# Altium PCB board.PcbDoc (part 2 of 2)
Units mil, origin at the board's own origin, x right, y up, seen from the top; angles counter-clockwise.
Board outline 5000 x 4000 mil, 2 copper layers (Top Layer, Bottom Layer); 120 components, 119 nets, 460 pads, 45 vias.
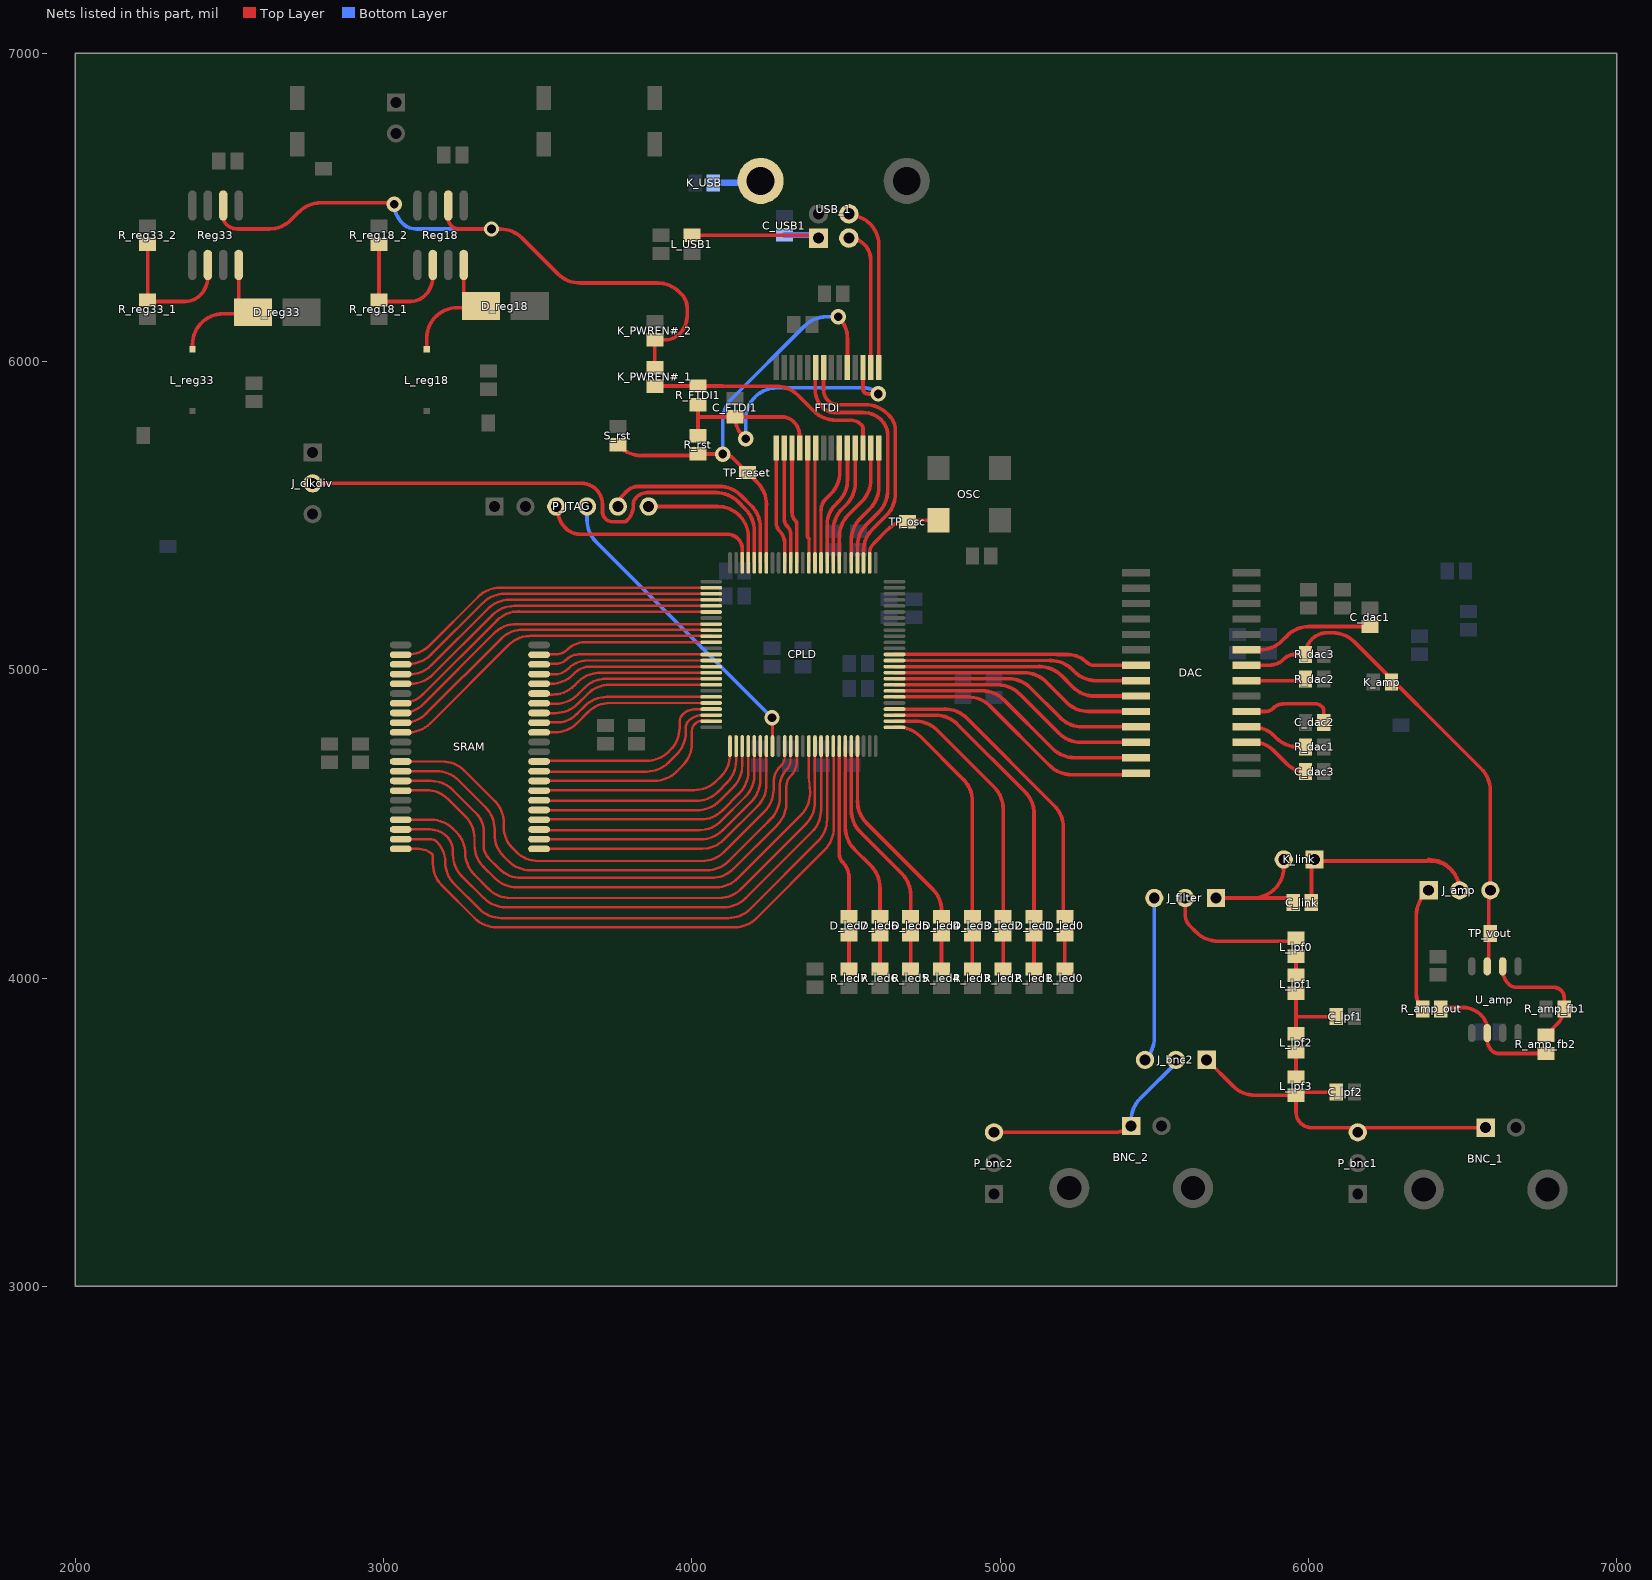
[diagram p2: the nets of this part, all layers, seen from the top]

## Via types
v1: diameter 50, hole 28, Top Layer to Bottom Layer, 42 vias
v2: diameter 196.85, hole 100, Top Layer to Bottom Layer, 3 vias

## Nets (pads, with @x,y where several pads share a name; then routed paths per layer and width w, separated by ;. In a path a pad name is that pad's centre, name@x,y a point inside that pad or via, vN(x,y) a via of type N, cw(c..) or ccw(c..) an arc to the next point about the centre after c; other vN are vias at no path point) (continued)
DAC_DATA6: CPLD.13 DAC.7 | length 797
  Top Layer w11: CPLD.13@4657.24,5050 5185.68,5050
  Top Layer w12: 5185.68,5049.69 5220.41,5049.69 cw(c5220.41,4965.41) 5280,5025 ccw(c5304.14,5049.14) 5304.14,5015 DAC.7@5440.87,5015 DAC.7@5445,5015
DAC_DATA7: CPLD.12 DAC.8 | length 806.2
  Top Layer w11: CPLD.12@4657.24,5030.31 5163.26,5030.31
  Top Layer w12: 5163.26,5030.31 cw(c5163.26,4930.31) 5233.97,5001.03 5240.71,4994.29 ccw(c5311.42,5065) 5311.42,4965 DAC.8@5440.87,4965 DAC.8@5445,4965
DAC_DATA8: CPLD.11 DAC.9 | length 813.8
  Top Layer w11: CPLD.11@4657.24,5010.63 5127.95,5010.63
  Top Layer w12: 5127.95,5010.63 cw(c5127.95,4910.63) 5198.66,4981.34 5235.71,4944.29 ccw(c5306.42,5015) 5306.42,4915 DAC.9@5440,4915
DAC_DATA9: CPLD.10 DAC.10 | length 826.3
  Top Layer w11: CPLD.10@4657.24,4990.94 5077.63,4990.94
  Top Layer w12: 5077.63,4990.94 cw(c5077.63,4890.94) 5148.34,4961.66 5215.71,4894.29 ccw(c5286.42,4965) 5286.42,4865 DAC.10@5440,4865
DAC_DATA10: CPLD.9 DAC.11 | length 838.9
  Top Layer w11: CPLD.9@4657.24,4971.26 5027.32,4971.26
  Top Layer w12: 5027.32,4971.26 cw(c5027.32,4871.26) 5098.03,4941.97 5195.71,4844.29 ccw(c5266.42,4915) 5266.42,4815 DAC.11@5440,4815
DAC_DATA11: CPLD.8 DAC.12 | length 861.4
  Top Layer w11: CPLD.8@4657.24,4951.57 4992,4951.57
  Top Layer w12: 4992,4951.57 cw(c4992,4851.57) 5062.71,4922.29 5190.71,4794.29 ccw(c5261.42,4865) 5261.42,4765 DAC.12@5440.87,4765 DAC.12@5450,4765
DAC_DATA12: CPLD.7 DAC.13 | length 864
  Top Layer w11: CPLD.7@4657.24,4931.89 4941.69,4931.89
  Top Layer w12: 4941.69,4931.89 cw(c4941.69,4831.89) 5012.4,4902.6 5170.71,4744.29 ccw(c5241.42,4815) 5241.42,4715 DAC.13@5440,4715
DAC_DATA13: CPLD.6 DAC.14 | length 883.6
  Top Layer w11: CPLD.6@4657.24,4912.2 4896.37,4912.2 cw(c4896.37,4812.2) 4967.08,4882.92
  Top Layer w12: 4967.08,4882.92 5160.71,4689.29 ccw(c5231.42,4760) 5231.42,4660 DAC.14@5445,4660
LED0: CPLD.4 D_led0.2 | length 1020.7
  Top Layer w11: CPLD.4@4657.24,4872.83 4820.74,4872.83
  Top Layer w12: 4820.74,4872.83 cw(c4820.74,4772.83) 4891.45,4843.55 5175.71,4559.29 cw(c5105,4488.58) 5205,4488.58 D_led0.2@5205,4195 ; D_led0.2@5210,4195 D_led0.2@5210,4199.53
LED1: CPLD.3 D_led1.2 | length 934.4
  Top Layer w11: CPLD.3@4657.24,4853.15 4790.43,4853.15
  Top Layer w12: 4790.43,4853.15 cw(c4790.43,4753.15) 4861.14,4823.86 5080.71,4604.29 cw(c5010,4533.58) 5110,4533.58 D_led1.2@5110,4200
LED2: CPLD.2 D_led2.2 | length 840
  Top Layer w11: CPLD.2@4657.24,4833.46 4725.11,4833.46
  Top Layer w12: 4725.11,4833.46 cw(c4725.11,4733.46) 4795.82,4804.18 4980.71,4619.29 cw(c4910,4548.58) 5010,4548.58 D_led2.2@5010,4195
LED3: CPLD.1 D_led3.2 | length 741.5
  Top Layer w11: CPLD.1@4669.8,4813.78 cw(c4669.8,4713.78) 4740.51,4784.49
  Top Layer w12: CPLD.1@4657.24,4813.78 CPLD.1@4669.8,4813.78 ; 4740.51,4784.49 4880.71,4644.29 cw(c4810,4573.58) 4910,4573.58 D_led3.2@4910,4200
LED4: CPLD.97 D_led4.2 | length 657.6
  Top Layer w11: 4537.17,4574.26 CPLD.97@4537.17,4752.76
  Top Layer w12: 4537.17,4574.26 ccw(c4637.17,4574.26) 4566.45,4503.55 4780.71,4289.29 cw(c4710,4218.58) 4810,4218.58 4810,4200 D_led4.2@4810,4199.53
LED5: CPLD.96 D_led5.2 | length 623.9
  Top Layer w11: 4517.48,4543.94 CPLD.96@4517.48,4752.76
  Top Layer w12: 4517.48,4543.94 ccw(c4617.48,4543.94) 4546.77,4473.23 4680.71,4339.29 cw(c4610,4268.58) 4710,4268.58 D_led5.2@4710,4200
LED6: CPLD.95 D_led6.2 | length 591.1
  Top Layer w11: 4497.8,4488.63 CPLD.95@4497.8,4752.76
  Top Layer w12: 4497.8,4488.63 ccw(c4597.8,4488.63) 4527.08,4417.92 4580.71,4364.29 cw(c4510,4293.58) 4610,4293.58 D_led6.2@4610,4199.53
LED7: CPLD.94 D_led7.2 | length 566.3
  Top Layer w11: 4478.11,4403.7 CPLD.94@4478.11,4752.76
  Top Layer w12: 4478.11,4403.7 ccw(c4518.7,4403.7) 4490,4375 cw(c4441.72,4326.72) 4510,4326.72 D_led7.2@4510,4195
MEM_ADDR0: CPLD.78 SRAM.5 | length 797.5
  Top Layer w8: SRAM.5@3504.41,4545.28 SRAM.5@3505,4545.28 ; SRAM.5@3505,4545 4018.58,4545 ccw(c4018.58,4645) 4026,4545.28 ccw(c4018.58,4645) 4089.29,4574.29 4133.86,4618.86 ccw(c4063.15,4689.57) 4163.15,4689.57 CPLD.78@4163.15,4752.76
MEM_ADDR1: CPLD.79 SRAM.4 | length 840.9
  Top Layer w8: SRAM.4@3505,4515 4028.58,4515 ccw(c4028.58,4615) 4099.29,4544.29 4153.55,4598.55 ccw(c4082.83,4669.26) 4182.83,4669.26 CPLD.79@4182.83,4752.76
MEM_ADDR2: CPLD.80 SRAM.3 | length 881.7
  Top Layer w8: SRAM.3@3504.41,4482.28 SRAM.3@3505,4482.28 ; SRAM.3@3505,4480 4023.58,4480 ccw(c4023.58,4580) 4044.83,4482.28 ccw(c4023.58,4580) 4073.15,4493.15 ccw(c4023.58,4580) 4094.29,4509.29 4173.23,4588.23 ccw(c4102.52,4658.94) 4189.37,4609.37 ccw(c4102.52,4658.94) 4202.52,4658.94 CPLD.80@4202.52,4752.76
MEM_ADDR3: CPLD.81 SRAM.2 | length 922.2
  Top Layer w8: SRAM.2@3505,4450 4028.58,4450 ccw(c4028.58,4550) 4068.17,4458.17 ccw(c4028.58,4550) 4099.29,4479.29 4192.92,4572.92 ccw(c4122.2,4643.63) 4214.03,4604.03 ccw(c4122.2,4643.63) 4222.2,4643.63 CPLD.81@4222.2,4752.76
MEM_ADDR4: CPLD.82 SRAM.1 | length 953.3
  Top Layer w8: SRAM.1@3515,4420 4033.58,4420 ccw(c4033.58,4520) 4104.29,4449.29 4212.6,4557.6 ccw(c4141.89,4628.31) 4241.89,4628.31 CPLD.82@4241.89,4752.76
MEM_ADDR5: CPLD.93 SRAM.44 | length 1951.7
  Top Layer w8: SRAM.44@3055.59,4419.29 3113.43,4419.29 cw(c3113.43,4353.43) 3160,4400 3160,4371.42 ccw(c3260,4371.42) 3165,4340.2 ccw(c3260,4371.42) 3189.29,4300.71 3295.71,4194.29 ccw(c3366.42,4265) 3366.42,4165 4138.58,4165 ccw(c4138.58,4265) 4209.29,4194.29 4430.71,4415.71 ccw(c4360,4486.42) 4460,4486.42 CPLD.93@4460,4750
MEM_ADDR6: CPLD.92 SRAM.43 | length 1928.1
  Top Layer w8: SRAM.43@3055,4450 SRAM.43@3056.43,4450 ; SRAM.43@3069.56,4445 cw(c3069.56,4464.76) SRAM.43@3056.42,4450 ; CPLD.92@4438.74,4752.76 4438.74,4515.16 cw(c4338.74,4515.16) 4409.45,4444.45 4189.29,4224.29 cw(c4118.58,4295) 4118.58,4195 3381.42,4195 cw(c3381.42,4295) 3310.71,4224.29 3229.29,4305.71 cw(c3300,4376.42) 3200,4376.42 ccw(c3106.86,4376.42) 3172.72,4442.28 ccw(c3154.08,4423.64) 3154.08,4450 SRAM.43@3057.49,4450 ; SRAM.43@3055.59,4450.79 ccw(c3057.49,4452.69) SRAM.43@3057.49,4450 ; SRAM.43@3055.59,4450.79 ccw(c3057.49,4452.69) SRAM.43@3057.49,4450 ; SRAM.43@3055.59,4450.79 ccw(c3069.56,4464.76) SRAM.43@3056.42,4450 ; SRAM.43@3056.43,4450 SRAM.43@3057.49,4450
MEM_ADDR7: CPLD.91 SRAM.42 | length 1853.8
  Top Layer w8: SRAM.42@3055.59,4482.28 3151.2,4482.28 cw(c3151.2,4406.2) 3205,4460 cw(c3156.72,4411.72) 3225,4411.72 3225,4400 ccw(c3321.57,4400) 3253.28,4331.72 3325.71,4259.29 ccw(c3396.42,4330) 3396.42,4230 4103.58,4230 ccw(c4103.58,4330) 4174.29,4259.29 4389.77,4474.77 ccw(c4319.06,4545.48) 4419.06,4545.48 CPLD.91@4419.06,4752.76
MEM_ADDR8: CPLD.55 SRAM.27 | length 1103.7
  Top Layer w8: SRAM.27@3055,4955 3088.58,4955 ccw(c3088.58,5055) 3106.65,4956.65 ccw(c3088.58,5055) 3159.29,4984.29 3353.19,5178.19 cw(c3423.9,5107.48) 3423.9,5207.48 CPLD.55@4062.76,5207.48
MEM_ADDR9: CPLD.54 SRAM.26 | length 1120.1
  Top Layer w8: SRAM.26@3034.37,4985 3050,4985 3055.59,4985 3083.58,4985 ccw(c3083.58,5085) 3101.65,4986.65 ccw(c3083.58,5085) 3154.29,5014.29 3337.88,5197.88 cw(c3408.59,5127.17) 3408.59,5227.17 CPLD.54@4062.76,5227.17
MEM_ADDR10: CPLD.53 SRAM.25 | length 1093.1
  Top Layer w8: SRAM.25@3055,5020 3083.58,5020 ccw(c3083.58,5120) 3154.29,5049.29 3322.56,5217.56 cw(c3393.27,5146.85) 3374.49,5245.07 cw(c3393.27,5146.85) 3393.27,5246.85 CPLD.53@4062.76,5246.85
MEM_ADDR11: CPLD.52 SRAM.24 | length 1093.8
  Top Layer w8: SRAM.24@3050,5050 3055,5050 3055.59,5050 3058.58,5050 3078.58,5050 ccw(c3078.58,5150) 3149.29,5079.29 3307.25,5237.25 cw(c3377.96,5166.54) 3377.96,5266.54 CPLD.52@4062.76,5266.54
MEM_ADDR12: CPLD.61 SRAM.21 | length 573.3
  Top Layer w8: SRAM.21@3500,5050 3558.79,5050 ccw(c3558.79,5101.21) 3571.64,5051.64 ccw(c3558.79,5101.21) 3595,5065 cw(c3653.83,5006.17) 3653.83,5089.37 CPLD.61@4062.76,5089.37
MEM_ADDR13: CPLD.63 SRAM.20 | length 566.4
  Top Layer w8: SRAM.20@3504.41,5017.72 SRAM.20@3505,5017.72 ; SRAM.20@3505,5020 3558.79,5020 ccw(c3558.79,5071.21) 3595,5035 cw(c3631.21,4998.79) 3631.21,5050 CPLD.63@4062.76,5050
MEM_ADDR14: CPLD.64 SRAM.19 | length 574.9
  Top Layer w8: SRAM.19@3500,4985 3551.72,4985 ccw(c3551.72,5053.28) 3564.57,4986.22 ccw(c3551.72,5053.28) 3600,5005 cw(c3661.12,4943.88) 3661.12,5030.32 CPLD.64@4062.76,5030.31
MEM_ADDR15: CPLD.65 SRAM.18 | length 578.5
  Top Layer w8: SRAM.18@3500,4955 3543.58,4955 ccw(c3543.58,5055) 3614.29,4984.29 3620,4990 cw(c3669.8,4940.19) 3665.5,5010.5 cw(c3669.8,4940.19) 3669.8,5010.63 CPLD.65@4062.76,5010.63
MEM_C\E\: CPLD.77 SRAM.6 | length 759.9
  Top Layer w8: SRAM.6@3505,4575 4013.58,4575 ccw(c4013.58,4675) 4084.29,4604.29 4114.18,4634.18 ccw(c4043.46,4704.89) 4143.46,4704.89 CPLD.77@4143.46,4752.76 cw(c4139.76,4749.05) CPLD.77@4145,4749.05
MEM_DATA0: CPLD.76 SRAM.7 | length 714.4
  Top Layer w8: SRAM.7@3504.41,4608.27 cw(c3508.59,4604.09) SRAM.7@3508.59,4610 ; SRAM.7@3505,4610 SRAM.7@3508.59,4610 ; CPLD.76@4123.78,4752.76 4123.78,4725.2 cw(c4023.78,4725.2) 4094.49,4654.49 4079.29,4639.29 cw(c4008.58,4710) 4008.58,4610 SRAM.7@3508.59,4610
MEM_DATA1: CPLD.74 SRAM.8 | length 684.3
  Top Layer w8: 3805,4639.76 SRAM.8@3504.41,4639.76 ; 3805,4640 3878.58,4640 ccw(c3878.58,4740) 3899.27,4642.16 ccw(c3878.58,4740) 3949.29,4669.29 3970.71,4690.71 ccw(c3900,4761.42) 4000,4761.42 4000,4800.86 cw(c4034.14,4800.86) 4009.98,4824.98 cw(c4034.14,4800.86) 4024.02,4833.46 cw(c4034.14,4800.86) 4034.14,4835 CPLD.74@4060,4835 ; CPLD.74@4060,4833.46 CPLD.74@4062.76,4833.46 ; SRAM.8@3504.41,4639.76 cw(c3504.65,4639.76) SRAM.8@3504.65,4640 ; SRAM.8@3504.41,4639.76 cw(c3504.65,4639.76) SRAM.8@3504.65,4640 ; SRAM.8@3504.41,4639.76 cw(c3504.65,4639.76) SRAM.8@3504.65,4640
MEM_DATA2: CPLD.73 SRAM.9 | length 666.9
  Top Layer w8: SRAM.9@3500,4670 3853.58,4670 ccw(c3853.58,4770) 3924.29,4699.29 3950.71,4725.71 ccw(c3880,4796.42) 3980,4796.42 3980,4810.86 cw(c4014.14,4810.86) 3989.98,4834.98 cw(c4033.82,4791.18) 4033.82,4853.15 CPLD.73@4062.76,4853.15
MEM_DATA3: CPLD.72 SRAM.10 | length 659.1
  Top Layer w8: SRAM.10@3504.41,4702.76 SRAM.10@3505,4702.76 ; SRAM.10@3505,4705 3853.58,4705 ccw(c3853.58,4805) 3924.29,4734.29 3930.71,4740.71 ccw(c3860,4811.42) 3960,4811.42 3960,4830.86 cw(c3994.14,4830.86) 3961.8,4841.8 cw(c3994.14,4830.86) 3970,4855 cw(c4013.06,4811.94) 3986.96,4866.96 cw(c4013.06,4811.94) 4013.06,4872.83 CPLD.72@4062.76,4872.83
MEM_DATA4: CPLD.71 SRAM.13 | length 595.9
  Top Layer w8: SRAM.13@3500,4795 SRAM.13@3504.41,4795 ; SRAM.13@3504.41,4797.24 3555.82,4797.24 ccw(c3555.82,4897.24) 3605.4,4810.4 ccw(c3555.82,4897.24) 3626.53,4826.53 3663.23,4863.23 cw(c3733.94,4792.52) 3733.37,4892.52 cw(c3733.94,4792.52) 3733.94,4892.52 CPLD.71@4062.76,4892.52 ; CPLD.71@4062.76,4894.3 CPLD.71@4065,4894.3
MEM_DATA5: CPLD.70 SRAM.14 | length 589
  Top Layer w8: SRAM.14@3500,4830 3567.74,4830 ccw(c3567.74,4906) 3621.48,4852.26 ccw(c3558.58,4930) 3629.29,4859.29 3652.92,4882.92 cw(c3723.63,4812.2) 3723.63,4912.2 CPLD.70@4062.76,4912.2
MEM_DATA6: CPLD.68 SRAM.15 | length 605
  Top Layer w8: SRAM.15@3500,4860 3558.58,4860 ccw(c3558.58,4960) 3629.29,4889.29 3662.29,4922.29 cw(c3733,4851.57) 3733,4951.57 CPLD.68@4062.76,4951.57 ; SRAM.15@3504.41,4860.24 3505.36,4861.18 cw(c3576.07,4790.47) SRAM.15@3514.03,4868.91
MEM_DATA7: CPLD.67 SRAM.16 | length 587.8
  Top Layer w8: SRAM.16@3500,4890 3558.58,4890 ccw(c3558.58,4990) 3577.11,4891.73 ccw(c3558.58,4990) 3629.29,4919.29 3651.97,4941.97 cw(c3722.68,4871.26) 3690.78,4966.03 cw(c3722.68,4871.26) 3706.86,4970 cw(c3722.68,4871.26) 3722.68,4971.26 CPLD.67@4062.76,4971.26
MEM_DATA8: CPLD.56 SRAM.29 | length 1146.1
  Top Layer w8: SRAM.29@3055.59,4891.73 3057.68,4891.73 ccw(c3057.68,4991.73) 3128.39,4921.02 3367.66,5160.29 cw(c3438.37,5089.57) 3438.37,5189.57 ; 3419.22,5187.8 CPLD.56@4062.76,5187.8 ; CPLD.56@4056.44,5186.02 CPLD.56@4060,5189.57
MEM_DATA9: CPLD.58 SRAM.30 | length 1140.3
  Top Layer w8: SRAM.30@3035.59,4860 3055,4860 3055.59,4860 3058.58,4860 ccw(c3058.58,4960) 3068.1,4860.45 ccw(c3058.58,4960) 3129.29,4889.29 3359.14,5119.14 cw(c3429.85,5048.43) 3429.85,5148.43 CPLD.58@4062.76,5148.43 CPLD.58@4061.18,5150
MEM_DATA10: CPLD.59 SRAM.31 | length 1120.6
  Top Layer w8: SRAM.31@3055.59,4828.74 3067.32,4828.74 ccw(c3067.32,4928.74) 3102.14,4835 ccw(c3067.32,4928.74) 3138.03,4858.03 3380.71,5100.71 cw(c3451.42,5030) 3434.69,5128.59 cw(c3451.42,5030) 3451.42,5130 CPLD.59@4060,5130
MEM_DATA11: CPLD.60 SRAM.32 | length 1154.8
  Top Layer w8: SRAM.32@3035.59,4795 SRAM.32@3060,4795 ; SRAM.32@3055.59,4797.24 3080.82,4797.24 ccw(c3080.82,4897.24) 3084.65,4797.32 ccw(c3080.82,4897.24) 3151.53,4826.53 3405.71,5080.71 cw(c3476.42,5010) 3462.71,5109.06 cw(c3476.42,5010) 3476.42,5110 CPLD.60@4065,5110
MEM_DATA12: CPLD.85 SRAM.35 | length 1695.3
  Top Layer w8: SRAM.35@3040.76,4705 cw(c3040.76,4687.93) SRAM.35@3052.21,4700.59 ; SRAM.35@3048.94,4700 ccw(c3048.94,4709.41) SRAM.35@3052.22,4700.59 ; SRAM.35@3055,4705 SRAM.35@3061.01,4705 ; SRAM.35@3062.24,4700 cw(c3062.24,4709.41) SRAM.35@3055.59,4702.76 ; CPLD.85@4300.94,4752.76 4300.94,4716.42 cw(c4263.58,4716.42) 4290,4690 4286.21,4686.21 ccw(c4337.43,4635) 4265,4635 4265,4611.42 cw(c4165,4611.42) 4235.71,4540.71 4104.29,4409.29 cw(c4033.58,4480) 4033.58,4380 3501.42,4380 cw(c3501.42,4480) 3430.71,4409.29 3418.28,4421.72 cw(c3486.57,4490) 3390,4490 3390,4503.58 ccw(c3290,4503.58) 3360.71,4574.29 3261.53,4673.47 ccw(c3190.82,4602.76) 3190.82,4702.76 SRAM.35@3055.59,4702.76 ; SRAM.35@3052.21,4700.59 cw(c3040.76,4687.93) 3052.83,4700 ccw(c3052.83,4702.76) SRAM.35@3055.59,4702.76 ; SRAM.35@3052.22,4700.59 ccw(c3048.94,4709.41) SRAM.35@3055.59,4702.76 ; SRAM.35@3055.59,4702.76 cw(c3061.01,4697.34) SRAM.35@3061.01,4705 ; SRAM.35@3055.59,4702.76 cw(c3061.01,4697.34) SRAM.35@3061.01,4705
MEM_DATA13: CPLD.86 SRAM.36 | length 1737.8
  Top Layer w8: SRAM.36@3055.59,4671.26 3172.32,4671.26 cw(c3172.32,4571.26) 3243.03,4641.97 3330.71,4554.29 cw(c3260,4483.58) 3360,4483.58 3360,4465 ccw(c3456.57,4465) 3388.28,4396.72 3405.71,4379.29 ccw(c3476.42,4450) 3476.42,4350 4048.58,4350 ccw(c4048.58,4450) 4119.29,4379.29 4235,4495 ; 4260.71,4520.71 4250,4510 ; 4309.91,4679.91 cw(c4358.28,4631.72) 4310,4680 ; CPLD.86@4320,4745 4320,4704.14 cw(c4285.86,4704.14) 4310,4680 ; CPLD.86@4320.63,4745 CPLD.86@4320.63,4752.76 ; 4235,4495 4255.71,4515.71 ; 4235,4495 4250,4510 ; 4250,4510 4255.71,4515.71 ; 4255.71,4515.71 ccw(c4185,4586.42) 4285,4586.42 4285,4619.64 cw(c4370.36,4619.64) 4310,4680
MEM_DATA14: CPLD.87 SRAM.37 | length 1736.4
  Top Layer w8: SRAM.37@3055.59,4639.76 3153.81,4639.76 cw(c3153.81,4539.76) 3224.53,4610.47 3300.25,4534.75 cw(c3240.5,4475) 3325,4475 3325,4430 ; 3325,4428.06 ccw(c3380.67,4428.06) 3341.3,4388.7 3375.71,4354.29 ccw(c3446.42,4425) 3446.42,4325 4063.58,4325 ccw(c4063.58,4425) 4134.29,4354.29 4277.27,4497.27 ccw(c4206.56,4567.98) 4305.53,4553.68 ccw(c4206.56,4567.98) 4306.56,4567.98 4306.56,4622.56 cw(c4352.44,4622.56) 4320,4655 ccw(c4270.96,4704.04) 4340.31,4704.04 CPLD.87@4340.31,4752.76
MEM_DATA15: CPLD.89 SRAM.38 | length 1794.7
  Top Layer w8: SRAM.38@3055,4610 3138.58,4610 cw(c3138.58,4510) 3157.11,4608.27 cw(c3138.58,4510) 3209.29,4580.71 3265.71,4524.29 cw(c3195,4453.58) 3295,4453.58 3295,4431.42 ccw(c3395,4431.42) 3324.29,4360.71 3360.71,4324.29 ccw(c3431.42,4395) 3431.42,4295 4078.58,4295 ccw(c4078.58,4395) 4149.29,4324.29 4350.4,4525.4 ; 4350.71,4525.71 4350.4,4525.4 ; 4379.69,4648.9 4379.69,4670 CPLD.89@4379.69,4752.76 ; 4380,4645 4383.37,4599.79 cw(c4283.37,4599.79) 4354.08,4529.08 4350.4,4525.4
MEM_O\E\: CPLD.90 SRAM.41 | length 1821.3
  Top Layer w8: SRAM.41@3055,4515 SRAM.41@3060,4515 ; SRAM.41@3055.59,4513.78 3154.8,4513.78 cw(c3154.8,4413.78) 3225.51,4484.49 3235.71,4474.29 cw(c3165,4403.58) 3265,4403.58 3265,4395 ; 3265,4406.42 ccw(c3365,4406.42) 3294.29,4335.71 3340.71,4289.29 ccw(c3411.42,4360) 3411.42,4260 4088.58,4260 ccw(c4088.58,4360) 4159.29,4289.29 4370.08,4500.08 ccw(c4299.37,4570.79) 4399.37,4570.79 CPLD.90@4399.37,4752.76
MEM_W\E\: CPLD.66 SRAM.17 | length 583.5
  Top Layer w8: SRAM.17@3500,4920 3548.58,4920 ccw(c3548.58,5020) 3573.78,4923.23 ccw(c3548.58,5020) 3619.29,4949.29 3631.66,4961.66 cw(c3702.37,4890.94) 3677.91,4987.91 cw(c3702.37,4890.94) 3702.37,4990.94 CPLD.66@4062.76,4990.94
NetBNC_1_1: BNC_1.1 C_lpf2.2 J_bnc2.1 L_lpf3.2 P_bnc1.3 | length 1180.1
  Top Layer w12: J_bnc2.1@5687.07,3740 ccw(c5687.07,3722.93) 5675,3735 J_bnc2.1@5670,3735 5755.24,3649.76 ccw(c5825.95,3720.47) 5825.95,3620.47 L_lpf3.2@5960,3620.47 ; L_lpf3.2@5960,3620 5960,3565 ccw(c6010,3565) 6010,3515 BNC_1.1@6575,3515 ; L_lpf3.2@5960,3630 C_lpf2.2@6090,3630
NetBNC_2_1: BNC_2.1 J_bnc2.2 P_bnc2.3 | length 713.2
  Top Layer w12: P_bnc2.3@4980,3500 5371.72,3500 ccw(c5371.72,3568.28) BNC_2.1@5420,3520
  Bottom Layer w12: BNC_2.1@5425,3520 5425,3538.58 cw(c5525,3538.58) 5454.29,3609.29 J_bnc2.2@5575,3730
NetC_dac1_2: C_dac1.2 DAC.23 | length 427.4
  Top Layer w12: DAC.23@5799.13,5065 5843.58,5065 ccw(c5843.58,5165) 5914.29,5094.29 5931.72,5111.72 cw(c6000,5043.43) 6000,5140 cw(c6001.14,5138.86) 6001.14,5140.47 C_dac1.2@6200,5140.47 ; C_dac1.2@6198.86,5140 ccw(c6198.86,5141.61) C_dac1.2@6200,5140.47 ; C_dac1.2@6198.86,5140 ccw(c6198.86,5141.61) C_dac1.2@6200,5140.47 ; C_dac1.2@6198.86,5140 ccw(c6198.86,5141.61) C_dac1.2@6200,5140.47
NetC_dac2_2: C_dac2.2 DAC.19 | length 345.2
  Top Layer w12: DAC.19@5799.13,4865 5860.86,4865 ccw(c5860.86,4899.14) 5885,4875 cw(c5921.21,4838.79) 5921.21,4890 5985,4890 ; 5946.21,4890 5985,4890 ; C_dac2.2@6049.53,4830 6049.53,4869.07 ccw(c6034.07,4869.07) 6045,4880 ccw(c6020.86,4855.86) 6020.86,4890 5985,4890
NetC_dac3_1: C_dac3.1 DAC.17 | length 271.8
  Top Layer w12: DAC.17@5795,4765 DAC.17@5799.13,4765 ; DAC.17@5828.58,4765 DAC.17@5799.13,4765 ; C_dac3.1@5984.29,4675.71 C_dac3.1@5990,4670 ; C_dac3.1@5986.42,4670 C_dac3.1@5990,4670 ; C_dac3.1@5990.47,4670 C_dac3.1@5990,4670 ; C_dac3.1@5992.74,4672.26 C_dac3.1@5995,4670 ; DAC.17@5799.13,4765 5824.64,4765 cw(c5824.64,4679.64) 5885,4740 5930.25,4694.75 ccw(c5990,4754.5) C_dac3.1@5990,4670
NetC_FTDI1_1: C_FTDI1.1 FTDI.4 FTDI.17 R_FTDI1.2 R_rst.2 | length 1356.8
  Top Layer w12: R_rst.2@4020,5755 4020,5820.47 ; R_FTDI1.2@4020,5860.47 4020,5820.47 ; C_FTDI1.1@4133,5820.47 C_FTDI1.1@4140,5820.47 ; v1(4175,5750) v1@4165.08,5759.92 ; FTDI.4@4350,5715 4350,5719.09 FTDI.4@4350,5720.14 ; FTDI.4@4350.43,5719.09 cw(c4351.48,5720.14) FTDI.4@4350,5720.14 ; FTDI.17@4555,5980 4555,5912.07 ccw(c4572.07,5912.07) 4560,5900 ccw(c4572.07,5912.07) 4572.07,5895 v1(4605,5895) ; 4020,5820.47 C_FTDI1.1@4140,5820.47 ; C_FTDI1.1@4140,5820.47 ccw(c4225.64,5820.47) v1@4165.08,5759.92 ; C_FTDI1.1@4140,5820.47 ccw(c4225.64,5820.47) v1@4165.08,5759.92 ; C_FTDI1.1@4140,5820.47 4292.65,5820.47 cw(c4292.65,5767.65) 4330,5805 cw(c4281.72,5756.72) 4350,5756.72 FTDI.4@4350,5720.14 ; FTDI.17@4555,5980.53 cw(c4555.54,5980.53) FTDI.17@4555.16,5980.91 ccw(c4555.54,5980.53) FTDI.17@4555,5980.53
  Bottom Layer w12: v1(4175,5750) 4175,5813.58 cw(c4275,5813.58) 4204.29,5884.29 4205.71,5885.71 cw(c4276.42,5815) 4276.42,5915 4556.72,5915 cw(c4556.72,5846.72) v1(4605,5895)
NetC_link_1: C_link.1 J_amp.2 K_link.1 | length 862.9
  Top Layer w12: C_link.1@6005,4245 C_link.1@6009.53,4245 C_link.1@6020,4245 ; C_link.1@6010,4245 6010,4375 cw(c6015,4375) 6015,4380 6385,4380 ccw(c6385,4385) 6390,4385 cw(c6390,4285) J_amp.2@6490,4285 ; 6395,4380 cw(c6395,4285) J_amp.2@6490,4285 ; J_amp.2@6490,4310.86 J_amp.2@6490,4285
NetC_link_2: C_link.2 J_filter.1 K_link.2 | length 440.4
  Top Layer w12: J_filter.1@5700,4260 5820,4260 ; K_link.2@5915,4380 cw(c5915,4345) K_link.2@5920,4379.64 ; K_link.2@5920,4385 K_link.2@5920,4379.64 ; C_link.2@5950,4245 C_link.2@5950.47,4245 ; C_link.2@5950,4255 ccw(c5945,4255) 5945,4260 5820,4260 ; 5820,4260 ccw(c5820,4360) 5920,4360 K_link.2@5920,4379.64
NetC_lpf1_2: C_lpf1.2 L_lpf1.2 L_lpf2.1 | length 260.9
  Top Layer w12: L_lpf2.1@5960,3820 5960,3875 ; L_lpf1.2@5960,3950.47 5960,3875 ; C_lpf1.2@6090.47,3875 5960,3875
NetC_USB1_1: C_USB1.1 L_USB1.1 USB_1.1 | length 527.9
  Top Layer w12: USB_1.1@4410,6400 ccw(c4400.47,6400) 4400.47,6409.53 L_USB1.1@4000,6409.53 ; L_USB1.1@4000,6409.53 cw(c4000.47,6409.53) 4000.47,6410 ccw(c4000.47,6409.53) L_USB1.1@4000,6409.53
  Bottom Layer w12: USB_1.1@4394.53,6410.47 cw(c4394.53,6400) USB_1.1@4405,6400
  Bottom Layer w20: C_USB1.1@4300,6410.47 USB_1.1@4394.53,6410.47
NetCPLD_27: CPLD.27 OSC.3 TP_osc.1 | length 272.9
  Top Layer w11: CPLD.27@4576.54,5377.49 cw(c4622.51,5377.49) 4590,5410
  Top Layer w12: 4590,5410 4635.71,5455.71 cw(c4706.42,5385) 4706.42,5485 4715,5485 OSC.3@4800,5485
NetCPLD_28: CPLD.28 FTDI.22 | length 914.2
  Top Layer w11: CPLD.28@4556.85,5347.24 4556.85,5387.04
  Top Layer w12: FTDI.22@4427.2,5980.91 4427.2,5907.8 ; 4556.85,5387.04 cw(c4652.96,5387.04) 4585,5455 ; 4586.14,5456.14 4630.71,5500.71 ccw(c4560,5571.42) 4660,5571.42 4660,5776.72 ccw(c4591.72,5776.72) 4640,5825 4634.29,5830.71 ccw(c4563.58,5760) 4563.58,5860 4475,5860 ; 4427.2,5907.8 ccw(c4475,5907.8) 4475,5860 ; 4427.2,5907.8 ccw(c4475,5907.8) 4475,5860
NetCPLD_29: CPLD.29 FTDI.23 | length 842.7
  Top Layer w11: CPLD.29@4537.17,5347.24 4537.17,5402.8
  Top Layer w12: 4400,5900 FTDI.23@4400,5977.01 ; 4400.55,5900.65 ccw(c4485.36,5910.36) 4400.72,5899.28 ccw(c4485.36,5910.36) 4425,5850 ccw(c4461.21,5886.21) 4461.21,5835 4530,5835 4554.64,5835 cw(c4554.64,5749.64) 4615,5810 cw(c4566.72,5761.72) 4635,5761.72 4635,5581.42 cw(c4535,5581.42) 4605.71,5510.71 4566.45,5471.45 ; FTDI.23@4401.61,5980 FTDI.23@4401.61,5980.91 ; 4537.17,5402.8 cw(c4632.2,5402.8) 4565,5470 ; FTDI.23@4400,5977.01 cw(c4405.51,5977.01) FTDI.23@4401.61,5980.91 ; FTDI.23@4400,5977.01 cw(c4405.51,5977.01) FTDI.23@4401.61,5980.91
NetCPLD_30: CPLD.30 FTDI.14 | length 400.1
  Top Layer w11: CPLD.30@4517.48,5347.24 4517.48,5421.06
  Top Layer w12: 4517.48,5421.06 cw(c4617.48,5421.06) 4546.77,5491.77 4550,5495 4577.05,5522.05 ccw(c4506.34,5592.76) 4606.34,5592.76 FTDI.14@4606.34,5719.09
NetCPLD_32: CPLD.32 FTDI.13 | length 409.2
  Top Layer w11: CPLD.32@4478.11,5347.24 4478.11,5431.69
  Top Layer w12: 4478.11,5431.69 cw(c4578.11,5431.69) 4507.4,5502.4 ; 4505,5500 4551.46,5546.46 ccw(c4480.75,5617.17) 4580.75,5617.17 FTDI.13@4580.75,5719.09
NetCPLD_44: CPLD.44 FTDI.19 R_rst.1 S_rst.2 TP_reset.1 | length 1584
  Top Layer w11: CPLD.44@4241.89,5347.24 4241.89,5536.69
  Top Layer w12: S_rst.2@3760,5730.47 3766.18,5724.29 ccw(c3836.89,5795) 3836.89,5695 R_rst.1@4025,5695 ; R_rst.1@4025,5700 v1(4100,5700) cw(c4100,5651.72) 4134.14,5685.86 TP_reset.1@4180,5640 4212.6,5607.4 cw(c4141.89,5536.69) 4241.89,5536.69 ; v1(4475,6145) 4475.71,6144.29 cw(c4405,6073.58) 4505,6073.58 FTDI.19@4505,5975
  Bottom Layer w12: v1(4100,5700) 4100,5808.58 cw(c4200,5808.58) 4129.29,5879.29 4365.71,6115.71 cw(c4436.42,6045) 4436.42,6145 v1(4475,6145)
NetCPLD_45: CPLD.45 P_JTAG.5 | length 681.7
  Top Layer w11: CPLD.45@4222.2,5347.24 4222.2,5461.37
  Top Layer w12: P_JTAG.5@3760,5530 cw(c3808.28,5530) 3774.14,5564.14 3790,5580 cw(c3826.21,5543.79) 3826.21,5595 4088.58,5595 cw(c4088.58,5495) 4159.29,5565.71 4192.92,5532.08 cw(c4122.2,5461.37) 4222.2,5461.37
NetCPLD_46: CPLD.46 J_clkdiv.2 | length 1741.9
  Top Layer w11: CPLD.46@4202.52,5347.24 4202.52,5451.06
  Top Layer w12: J_clkdiv.2@2770,5605 3641.72,5605 cw(c3641.72,5536.72) 3690,5585 cw(c3641.72,5536.72) 3710,5536.72 3710,5515 ; 3710,5514.14 ccw(c3744.14,5514.14) 3719.98,5490.02 ccw(c3744.14,5514.14) 3744.14,5480 3777.93,5480 ccw(c3777.93,5497.07) 3790,5485 ccw(c3741.72,5533.28) 3810,5533.28 3810,5535.86 cw(c3844.14,5535.86) 3820,5560 cw(c3856.21,5523.79) 3856.21,5575 4078.58,5575 cw(c4078.58,5475) 4149.29,5545.71 4173.23,5521.77 cw(c4102.52,5451.06) 4202.52,5451.06
NetCPLD_47: CPLD.47 P_JTAG.6 | length 462
  Top Layer w11: 4154.29,5500.71 cw(c4084.61,5431.04) 4183.15,5431.04
  Top Layer w12: P_JTAG.6@3860,5530 4083.58,5530 cw(c4083.58,5430) 4154.29,5500.71 ; CPLD.47@4182.83,5347.24 4182.83,5429.77
NetCPLD_48: CPLD.48 P_JTAG.3 | length 727.3
  Top Layer w12: P_JTAG.3@3565,5530 3565,5520.36 ccw(c3650.36,5520.36) 3590,5460 ccw(c3638.28,5508.28) 3638.28,5440 4113.79,5440 cw(c4113.79,5388.79) 4150,5425 cw(c4118.25,5393.25) 4163.15,5393.25 CPLD.48@4163.15,5347.24
NetCPLD_83: CPLD.83 P_JTAG.4 | length 1031.4
  Top Layer w11: CPLD.83@4261.57,4752.76 v1@4261.57,4841.2
  Top Layer w12: v1(4260,4845) cw(c4256.2,4841.2) v1@4261.57,4841.2
  Bottom Layer w12: P_JTAG.4@3660,5530 3660,5486.42 ccw(c3760,5486.42) 3689.29,5415.71 v1(4260,4845) ccw(c4247.93,4845) v1@4256.46,4853.54
NetD_led0_1: D_led0.1 R_led0.1 | length 110.5
  Top Layer w12: R_led0.1@5210,4030 D_led0.1@5210,4140.47
NetD_led1_1: D_led1.1 R_led1.1 | length 116.8
  Top Layer w12: R_led1.1@5105,4025 ccw(c5092.93,4037.07) 5110,4037.07 D_led1.1@5110,4140.47
NetD_led2_1: D_led2.1 R_led2.1 | length 110.5
  Top Layer w12: R_led2.1@5010,4029.53 D_led2.1@5010,4140
NetD_led3_1: D_led3.1 R_led3.1 | length 110.5
  Top Layer w12: R_led3.1@4910,4030 D_led3.1@4910,4140.47
NetD_led4_1: D_led4.1 R_led4.1 | length 116.8
  Top Layer w12: R_led4.1@4805,4025 ccw(c4792.93,4037.07) 4810,4037.07 D_led4.1@4810,4140.47
NetD_led5_1: D_led5.1 R_led5.1 | length 110.5
  Top Layer w12: R_led5.1@4710,4029.53 D_led5.1@4710,4140
NetD_led6_1: D_led6.1 R_led6.1 | length 105.5
  Top Layer w12: R_led6.1@4610,4035 D_led6.1@4610,4140.47
NetD_led7_1: D_led7.1 R_led7.1 | length 110.5
  Top Layer w12: R_led7.1@4510,4030 D_led7.1@4510,4140.47
NetD_reg18_2: D_reg18.2 L_reg18.1 Reg18.8 | length 400.6
  Top Layer w12: L_reg18.1@3140,6040 3140,6075 cw(c3240,6075) 3240,6175 D_reg18.2@3300,6175 ; D_reg18.2@3260,6165 Reg18.8@3260,6313.54
NetD_reg33_2: D_reg33.2 L_reg33.1 Reg33.8 | length 420.6
  Top Layer w12: L_reg33.1@2380,6040 2380,6055 cw(c2480,6055) 2480,6155 D_reg33.2@2565,6155 ; D_reg33.2@2530,6150 Reg33.8@2530,6313.54
NetDAC_18: DAC.18 R_dac1.2 | length 214.2
  Top Layer w12: DAC.18@5799.13,4815 5818.58,4815 cw(c5818.58,4715) 5889.29,4785.71 5895.71,4779.29 ccw(c5966.42,4850) 5948.52,4751.62 ccw(c5966.42,4850) 5966.42,4750 R_dac1.2@5995,4750
NetDAC_21: DAC.21 R_dac2.2 | length 195.9
  Top Layer w12: DAC.21@5799.13,4965 R_dac2.2@5995,4965
NetDAC_22: DAC.22 J_amp.3 K_amp.2 R_dac3.2 TP_vout.1 U_amp.3 | length 1714.5
  Top Layer w12: DAC.22@5765.36,5015 DAC.22@5799.13,5015 5871.72,5015 ccw(c5871.72,5083.28) 5920,5035 cw(c5956.21,4998.79) 5956.21,5050 R_dac3.2@5990,5050 ; R_dac3.2@5990.47,5062 R_dac3.2@5990.47,5050 cw(c6060.47,5050) 6060.47,5120 6078.58,5120 cw(c6078.58,5020) 6149.29,5090.71 6560.71,4679.29 cw(c6490,4608.58) 6590,4608.58 J_amp.3@6590,4285 ; U_amp.3@6585,4045 6585,4272.93 cw(c6602.07,4272.93) J_amp.3@6590,4285 ; J_amp.3@6590,4280 J_amp.3@6590,4285 ; J_amp.3@6590,4308.58 J_amp.3@6590,4285 ; J_amp.3@6595.71,4279.29 J_amp.3@6590,4285
NetFTDI_12: FTDI.12 K_PWREN#_1.1 R_FTDI1.1 | length 842.3
  Top Layer w12: K_PWREN#_1.1@3880,5920.47 4018.86,5920.47 cw(c4018.86,5918.86) R_FTDI1.1@4020,5920 ; R_FTDI1.1@4001.14,5920 cw(c4001.14,5921.61) 4000,5920.47 4098.86,5920.47 cw(c4098.86,5918.86) 4100,5920 4273.58,5920 cw(c4273.58,5820) 4344.29,5890.71 4395.71,5839.29 ccw(c4466.42,5910) 4466.42,5810 4513.79,5810 cw(c4513.79,5758.79) 4550,5795 cw(c4537.55,5782.55) 4555.16,5782.55 FTDI.12@4555.16,5719.09 ; FTDI.12@4555,5719.48 ccw(c4555.54,5719.48) FTDI.12@4555.16,5719.09 ; FTDI.12@4555.16,5751.24 FTDI.12@4555.16,5719.09
NetFTDI_15: FTDI.15 USB_1.3 | length 549.1
  Top Layer w12: USB_1.3@4510,6475 cw(c4510,6378.66) 4606.34,6378.66 4606.34,6337.24 4606.34,6332.02 FTDI.15@4606.34,5980.91
NetFTDI_16: FTDI.16 USB_1.2 | length 460.1
  Top Layer w12: USB_1.2@4509.21,6400.63 4509.37,6400.63 cw(c4509.37,6330) 4580,6330 ; FTDI.16@4580.75,5980.91 4580.75,6329.91
NetJ_amp_1: J_amp.1 R_amp_out.1 | length 457.6
  Top Layer w12: J_amp.1@6390,4285 6379.29,4274.29 ccw(c6450,4203.58) 6350,4203.58 6350,3949.43 ; 6350,3949.43 ccw(c6419.9,3949.43) R_amp_out.1@6370.47,3900 cw(c6419.9,3949.43) 6350,3949.43
NetJ_bnc2_3: J_bnc2.3 J_filter.3 | length 550.2
  Bottom Layer w12: J_bnc2.3@5470,3735 J_bnc2.3@5470,3748.58 ; J_bnc2.3@5470,3740 cw(c5468.28,3738.28) 5470.71,3738.28 5470.71,3735.71 ccw(c5400,3806.42) 5500,3806.42 J_filter.3@5500,4260
NetJ_filter_2: J_filter.2 L_lpf0.1 | length 450.4
  Top Layer w12: J_filter.2@5600,4260 5600,4206.21 ccw(c5651.21,4206.21) 5614.99,4170.01 5635.71,4149.29 ccw(c5706.42,4220) 5706.42,4120 L_lpf0.1@5955,4120
NetK_USB_1: K_USB.1 USB_1.5 | length 169
  Bottom Layer w12: USB_1.5@4215,6580 ccw(c4215,6585) USB_1.5@4220,6585 ; K_USB.1@4069.53,6580 cw(c4074.53,6580) 4074.53,6585 ccw(c4074.53,6580) K_USB.1@4069.53,6580
  Bottom Layer w20: K_USB.1@4069.53,6580 USB_1.5@4215,6580
NetL_lpf0_2: L_lpf0.2 L_lpf1.1 | length 65.5
  Top Layer w12: L_lpf1.1@5960,4005 L_lpf1.1@5960,4009.53 L_lpf0.2@5960,4070.47
NetL_lpf2_2: L_lpf2.2 L_lpf3.1 | length 72.5
  Top Layer w12: L_lpf3.1@5960,3670 L_lpf2.2@5960,3742.5
NetR_amp_fb1_2: R_amp_fb1.2 R_amp_fb2.2 U_amp.2 | length 425
  Top Layer w12: U_amp.2@6630,4049.64 U_amp.2@6630,4038.27 6630,4030 6630,4028.28 ccw(c6698.28,4028.28) 6650,3980 ccw(c6674.14,4004.14) 6674.14,3970 6795.86,3970 cw(c6795.86,3935.86) 6820,3960 cw(c6797,3937) 6829.53,3937 R_amp_fb1.2@6829.53,3900 ; R_amp_fb2.2@6770,3814.53 6808.45,3852.98 ccw(c6756.43,3905) R_amp_fb1.2@6830,3905
NetR_amp_fb2_1: R_amp_fb2.1 R_amp_out.2 U_amp.6 | length 411.9
  Top Layer w12: 6455,3905 6499.64,3905 cw(c6499.64,3819.64) 6560,3880 cw(c6511.72,3831.72) 6580,3831.72 U_amp.6@6580,3821.73 ; U_amp.6@6580,3820 6580,3801.21 ccw(c6631.21,3801.21) 6595,3765 ccw(c6618,3788) 6618,3755.47 R_amp_fb2.1@6770,3755.47
NetR_reg18_1_1: R_reg18_1.1 R_reg18_2.1 Reg18.6 | length 443.7
  Top Layer w12: R_reg18_1.1@2975,6200 ccw(c2950.86,6224.14) 2985,6224.14 R_reg18_2.1@2985,6380.47 ; R_reg18_1.1@2985,6195 3086.72,6195 ccw(c3086.72,6263.28) 3135,6215 ccw(c3074.64,6275.36) 3160,6275.36 Reg18.6@3160,6313.54
NetR_reg33_1_1: R_reg33_1.1 R_reg33_2.1 Reg33.6 | length 465.6
  Top Layer w12: R_reg33_2.1@2235,6380 2235,6195 2356.72,6195 ccw(c2356.72,6263.28) 2405,6215 ccw(c2344.64,6275.36) 2430,6275.36 Reg33.6@2430,6313.54
P\W\R\E\N\: K_PWREN#_1.2 K_PWREN#_2.1 Reg18.2 Reg33.2 | length 2336.7
  Top Layer w12: Reg33.2@2480,6510 Reg33.2@2480,6506.46 2480,6469.14 ccw(c2514.14,6469.14) 2490,6445 ccw(c2526.21,6481.21) 2526.21,6430 2580,6430 ; 2618.58,6430 2580,6430 ; v1(3035,6510) ccw(c3022.93,6497.93) 3022.93,6515 2796.42,6515 ccw(c2796.42,6415) 2725.71,6485.71 2699.29,6459.29 cw(c2628.58,6530) 2628.58,6430 2580,6430 ; Reg18.2@3210,6483.28 Reg18.2@3210,6506.46 ; Reg18.2@3210,6548.79 Reg18.2@3210,6506.46 ; v1@3350,6425 ccw(c3345,6425) 3345,6430 3244.14,6430 cw(c3244.14,6464.14) 3220,6440 cw(c3244.14,6464.14) 3216.64,6443.91 cw(c3244.14,6464.14) 3210,6464.14 Reg18.2@3210,6506.46 ; v1(3350,6430) 3378.58,6430 cw(c3378.58,6330) 3449.29,6400.71 3565.71,6284.29 ccw(c3636.42,6355) 3636.42,6255 3888.58,6255 cw(c3888.58,6155) 3959.29,6225.71 3965,6220 cw(c3916.72,6171.72) 3985,6171.72 3985,6150.36 cw(c3899.64,6150.36) 3960,6090 cw(c3912.86,6137.14) 3912.86,6070.47 K_PWREN#_2.1@3880,6070.47 ; K_PWREN#_2.1@3875,6070.47 K_PWREN#_2.1@3880,6070.47 ; K_PWREN#_1.2@3880,5980 K_PWREN#_2.1@3880,6070.47
  Bottom Layer w12: v1@3032.53,6518.89 ccw(c3132.53,6518.89) 3061.82,6448.18 ccw(c3105.71,6492.07) 3105.71,6430 v1(3350,6430)
USB_DATA0: CPLD.41 FTDI.1 | length 385
  Top Layer w12: FTDI.1@4273.66,5719.09 4273.66,5477.37 ccw(c4312.37,5477.37) 4285,5450 cw(c4246.51,5411.51) 4300.94,5411.51 CPLD.41@4300.94,5347.24 ; FTDI.1@4275,5719.09 FTDI.1@4275,5725
USB_DATA1: CPLD.37 FTDI.5 | length 379.1
  Top Layer w10: CPLD.37@4379.69,5347.24 4380,5425
  Top Layer w12: FTDI.5@4375,5725 4375,5719.09 4375,5640 4375,5485 4375,5436.76 ccw(c4391.63,5436.76) 4379.87,5425
USB_DATA2: CPLD.39 FTDI.3 | length 376.9
  Top Layer w12: FTDI.3@4324.84,5719.09 4324.84,5509.52 ccw(c4359.52,5509.52) 4335,5485 cw(c4322.17,5472.17) 4340.31,5472.17 CPLD.39@4340.31,5347.24 ; FTDI.3@4325,5719.09 FTDI.3@4325,5720
USB_DATA3: CPLD.33 FTDI.11 | length 398.8
  Top Layer w11: CPLD.33@4458.43,5347.24 4458.43,5452
  Top Layer w12: 4458.43,5452 cw(c4558.43,5452) 4487.71,5522.71 4500.71,5535.71 ccw(c4430,5606.42) 4530,5606.42 4530,5719.09 4530,5720 FTDI.11@4530,5725
USB_DATA4: CPLD.40 FTDI.2 | length 386.1
  Top Layer w12: FTDI.2@4301.98,5723.02 4300,5725 4300,5720 4300,5719.09 4300,5489.14 ccw(c4334.14,5489.14) 4310,5465 cw(c4284.34,5439.34) 4320.63,5439.34 CPLD.40@4320.63,5347.24
USB_DATA5: CPLD.35 FTDI.9 | length 442
  Top Layer w11: CPLD.35@4419.06,5347.24 4419.06,5517.72
  Top Layer w12: 4419.06,5517.72 cw(c4470.57,5517.72) 4434.14,5554.14 4450.71,5570.71 ccw(c4380,5641.42) 4480,5641.42 FTDI.9@4480,5730 ; FTDI.9@4475.65,5719.09 FTDI.9@4475.65,5720 ; FTDI.9@4478.39,5688.53 FTDI.9@4478.39,5719.09 FTDI.9@4478.39,5710
USB_DATA6: CPLD.34 FTDI.10 | length 392
  Top Layer w11: CPLD.34@4438.74,5347.24 4438.74,5471.6
  Top Layer w12: 4438.74,5471.6 cw(c4528.4,5471.6) 4465,5535 4475.71,5545.71 ccw(c4405,5616.42) 4505,5616.42 FTDI.10@4505,5720
USB_DATA7: CPLD.36 FTDI.6 | length 353.8
  Top Layer w11: CPLD.36@4399.37,5347.24 FTDI.6@4399.37,5693.48
  Top Layer w12: FTDI.6@4399.37,5693.48 cw(c4401.52,5693.48) FTDI.6@4400,5695 ; FTDI.6@4400,5719.09 FTDI.6@4400,5725
pads on no net: CPLD.23 CPLD.24 CPLD.42 CPLD.43 CPLD.49 CPLD.50 CPLD.99 DAC.15 DAC.25 FTDI.8 FTDI.24 FTDI.27 FTDI.28 Reg18.5 Reg33.5 SRAM.22 SRAM.23 SRAM.28 U_amp.1 U_amp.5 U_amp.8 USB_1.6
copper on no net:
  other v2: 2235,3240 6760,6775 2235,6795

## Polygon pours and split planes (outlines as drawn)
AGND on Bottom Layer "GND_plane" (solid, remove dead copper, pour order 1001): 2035,3040 6970,3040 6970,6950 2035,6950 2035,6830
5VA on Bottom Layer "5V_plane" (solid, remove dead copper, pour order 1000): 6620,5175 5695,5175 ccw(c5695,5075) 5595,5075 5595,4850 5595,4830 ccw(c5695,4830) 5695,4730 6330,4730 6375,4730 cw(c6375,4630) 6475,4630 6475,3705 6475,3696.42 cw(c6375,3696.42) 6445.71,3625.71 6295,3475 cw(c6234.64,3535.36) 6234.64,3450 5750,3450 4945,3450 ccw(c4945,3400) 4895,3400 ccw(c4935,3400) 4935,3360 5220,3360 6338.58,3360 ccw(c6338.58,3460) 6409.29,3389.29 6585,3565 6590.71,3570.71 ccw(c6520,3641.42) 6620,3641.42 6620,4170 6620,5175
3V3 on Top Layer "3V3_plane" (solid, remove dead copper, pour order 1009): 2065,6955 2065,3070 6880,3070 6950,3070 6950,6950
AGND on Top Layer "GND_plane" (solid, remove dead copper, pour order 1008): 4800,2995 4800,3700 cw(c4900,3700) 4900,3800 5250,3800 5270,3800 ccw(c5270,3900) 5370,3900 5370,4365 5370,4370 cw(c5470,4370) 5470,4470 5565,4470 ccw(c5565,4500) 5595,4500 5595,5005 5595,5070 cw(c5695,5070) 5695,5170 6480,5170 7010,5170 7010,3145 7010,3000 4805,3000
3V3 on Top Layer "L3V3_pad1" (solid, remove dead copper, pour order 1002): 2280,5910 2315,5910 2315,5895 2335,5875 2425,5875 2445,5895 2445,5910 2480,5910 2480,5875 2445,5840 2315,5840 2280,5875
NetD_reg33_2 on Top Layer "L3V3_pad2" (solid, remove dead copper, pour order 1003): 2315,6040 2445,6040 2480,6005 2480,5970 2445,5970 2445,5985 2425,6005 2335,6005 2315,5985 2315,5970 2280,5970 2280,6005
NetD_reg18_2 on Top Layer "L1V8_pad2" (solid, remove dead copper, pour order 1004): 3040,5970 3075,5970 3075,5985 3095,6005 3185,6005 3205,5985 3205,5970 3240,5970 3240,6005 3205,6040 3075,6040 3040,6005
1V8 on Top Layer "L1V8_pad1" (solid, remove dead copper, pour order 1005): 3040,5910 3075,5910 3075,5895 3095,5875 3185,5875 3205,5895 3205,5910 3240,5910 3240,5875 3205,5840 3075,5840 3040,5875
5V on Top Layer "5V_plane" (solid, remove dead copper, pour order 1006): 4505,5925 4505,6120 ccw(c4405,6120) 4405,6220 4135,6220 4100,6220 cw(c4100,6320) 4000,6320 4000,6400 4000,6680 ccw(c3900,6680) 3900,6780 2740,6780 2630,6780 ccw(c2630,6680) 2530,6680 2530,6500 2530,6495 ccw(c2620,6495) 2620,6405 2680,6405 ccw(c2680,6485) 2760,6485 3125,6485 cw(c3125,6420) 3190,6420 ccw(c3200,6420) 3200,6410 3375,6410 3398.58,6410 cw(c3398.58,6310) 3469.29,6380.71 3590,6260 ccw(c3602.07,6272.07) 3602.07,6255 3880,6255 3880,5937.07 ccw(c3897.07,5937.07) 3885,5925 4413.58,5925 cw(c4413.58,5825) 4484.29,5895.71 4485,5895
AGND on Top Layer "GND_plane" (solid, remove dead copper, pour order 1007): 2465,6655 2335,6655 ccw(c2335,6555) 2235,6555 2235,6175 2235,5905 ccw(c2335,5905) 2335,5805 2495,5805 3293.58,5805 cw(c3293.58,5705) 3364.29,5775.71 3445,5695 4000,5695 4218.58,5695 cw(c4218.58,5595) 4289.29,5665.71 4385,5570 4518.58,5570 ccw(c4518.58,5670) 4589.29,5599.29 4610,5620 4610,6345 4610,6370 ccw(c4510,6370) 4510,6470 4500,6470 4500,6505 ccw(c4445,6505) 4445,6560 4405,6560 ccw(c4405,6460) 4305,6460 4305,6410 3740,6410 cw(c3740,6510) 3640,6510 3640,6655

## Keep-outs
Keep-Out Layer:
  lines w10: 2050,3050 2050,6950 6950,6950 6950,3050 2050,3050

## Other copper
Top Layer:
  pour cut-out: 2765,4825 3045,4825 3045,4625 2765,4625
  pour cut-out: 6325,4125 6890,4125 6890,3700 6325,3700
  pour cut-out: 5900,4175 5900,3575 6150,3575 6155,4175
  pour cut-out: 4115,4805 4115,4715 4000,4715 4000,4825
  pour cut-out: 4305,4590 4380,4590 4380,4540 4300,4540
  pour cut-out: 3082.37,4702.63 3101.67,4700 3500,4700 3495,4415 cw(c3434.64,4415) 3477.32,4372.32 3445,4340
  pour cut-out: 3055,4800 3505,4800 3505,5115 3253.28,5115 ccw(c3253.28,5046.72) 3205,5095
Bottom Layer:
  pour cut-out: 6322.5,4125 6887.5,4125 6887.5,3700 6325,3700
  pour cut-out: 5900,4175 5900,3575 6150,3575 6150,4175

## Silkscreen, mask and mechanical layers (free items; w line width, h text height)
Top Overlay:
  text "H.F." at 2855,5635 h60
  text "JTAG" at 3310,5605 h60
  text "Audio" at 2855,5530 h60
  text "3V3 GND TCK TDO TDI TMS" at 3320,5425 h50
  text "Fréquence" at 2645,5380 h60
  text "Capacité de liaison" at 5750,4525 h60
  text "inactive" at 5885,4460 h60
  text "Amplification" at 6340,4430 h60
  text "Filtre" at 5535,4405 h60
  text "active | inactive" at 6330,4370 h60
  text "entrée | signal" at 5430,4340 h60
  text "BNC2" at 5505,3885 h60
  text "entrée | sortie" at 5400,3820 h60
  text "BNC2" at 5155,3635 h60
  text "BNC1" at 6305,3635 h60
  text "S" at 6052.47,3485 h50
  text "S" at 4867.47,3480 h50
  text "5V" at 6020,3385 h50
  text "5V" at 4835,3380 h50
  text "G" at 6047.42,3280 h50
  text "G" at 4862.42,3275 h50
Mechanical 1:
  the board outline again, w10
Drill Drawing:
  text ".LEGEND" at 7245,3210 h60
  text "Drill Drawing." at 7245,3110 h60